# EAGLE board PicoBoard-GiantPanel-v12 (EAGLE 6.5.0), part 1 of 2
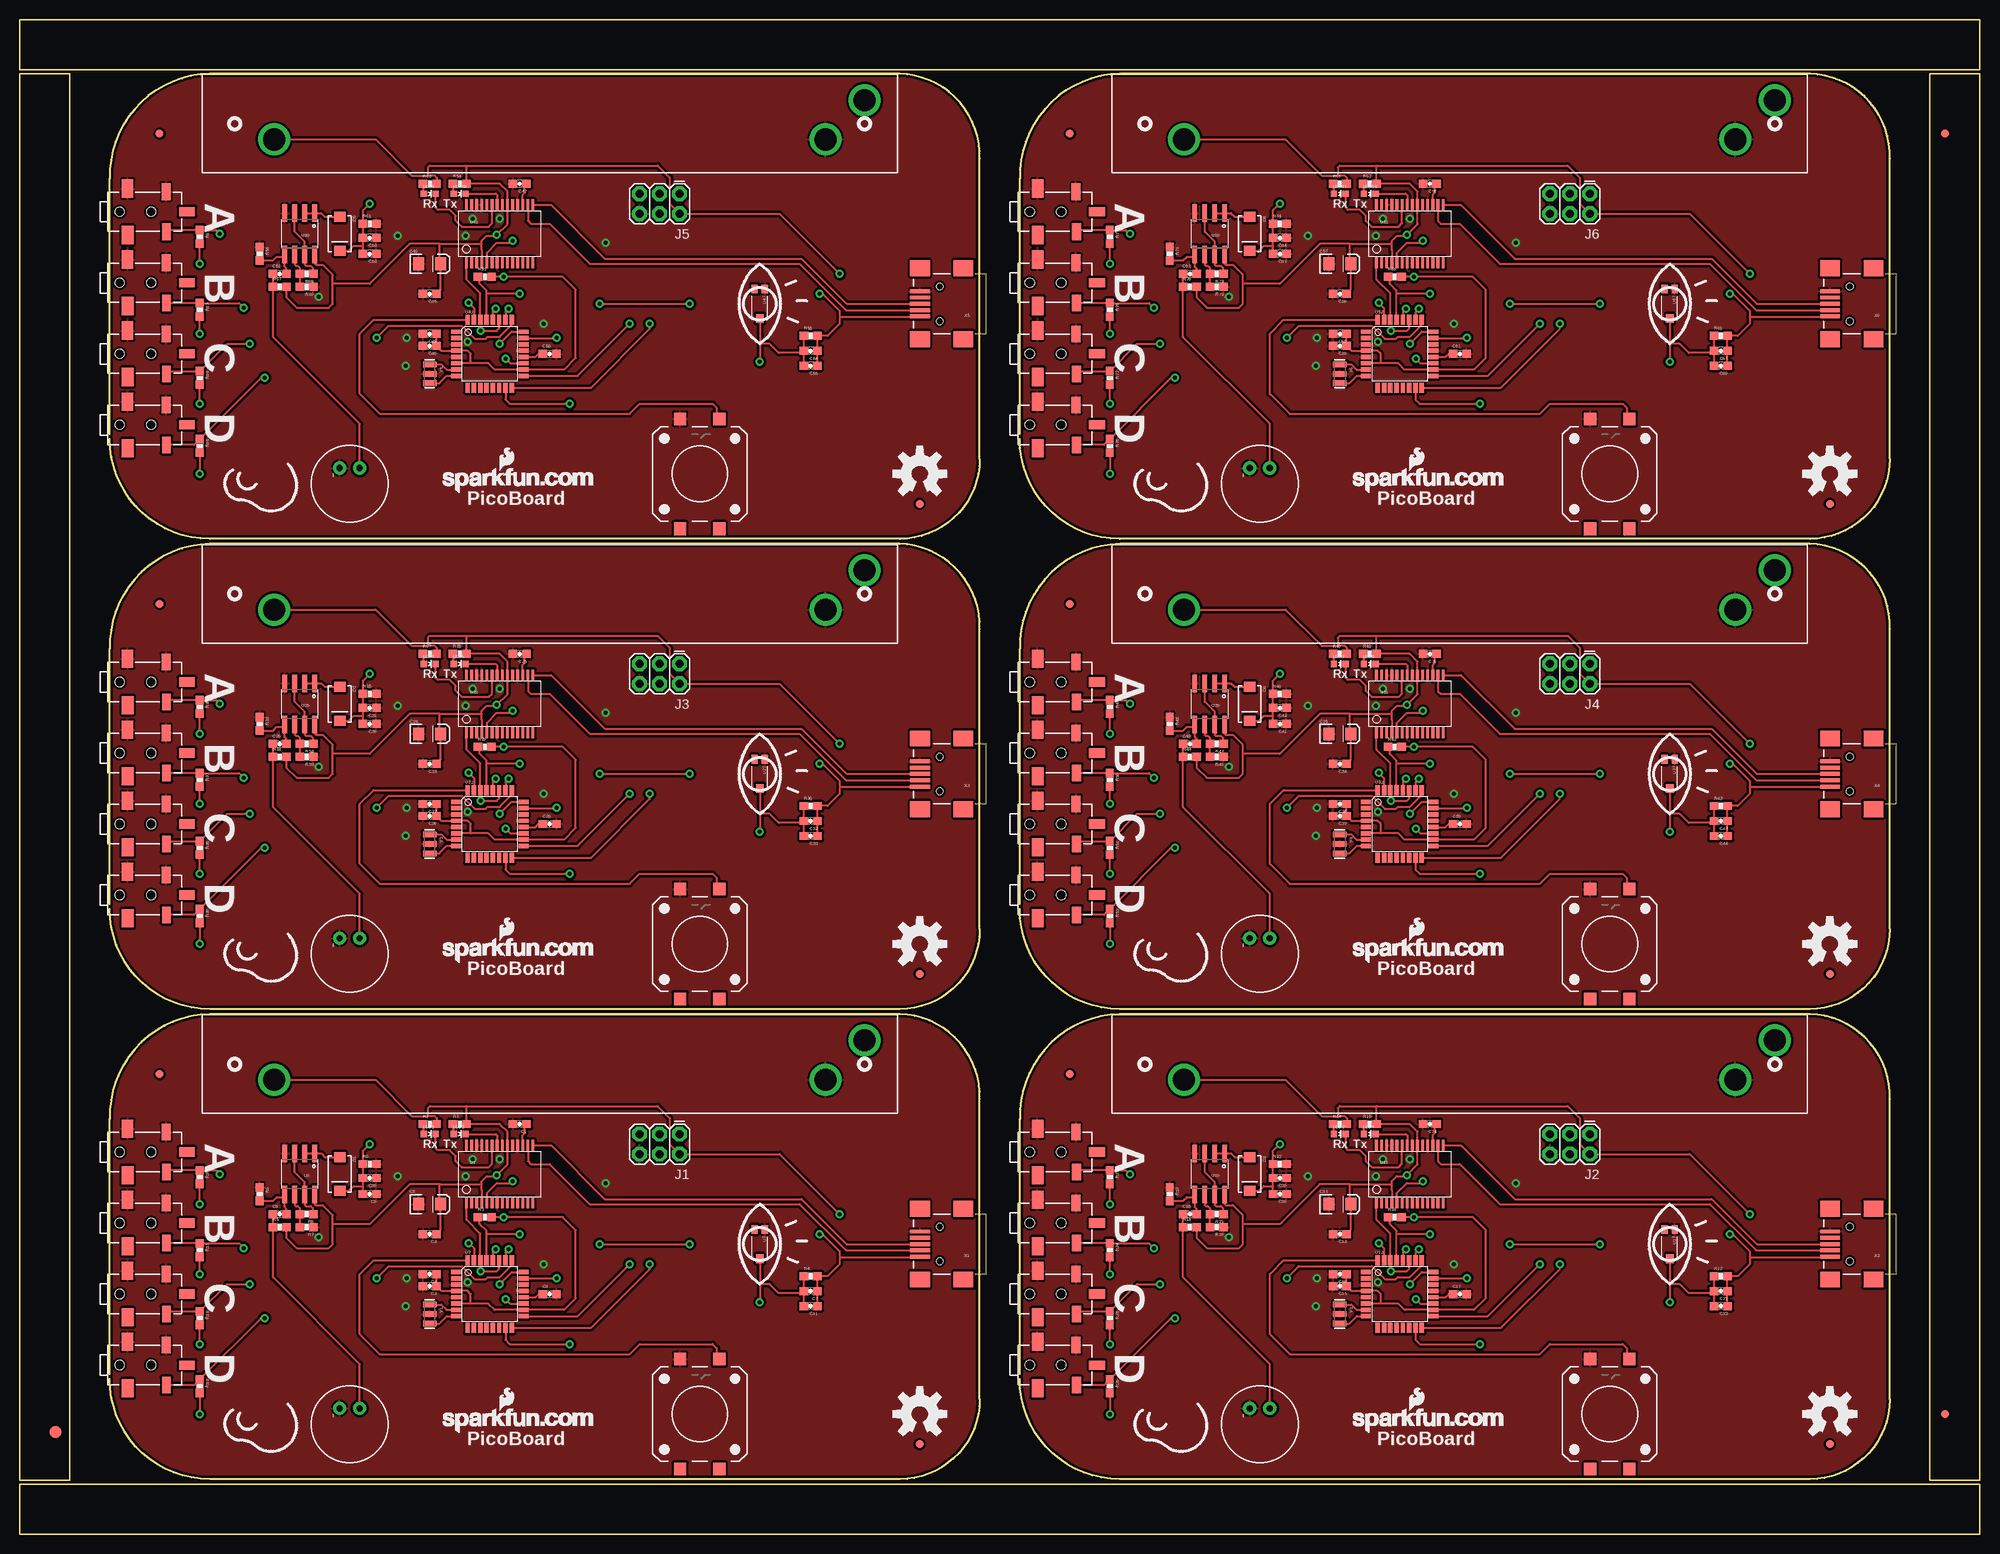
[diagram p0: board, top side]
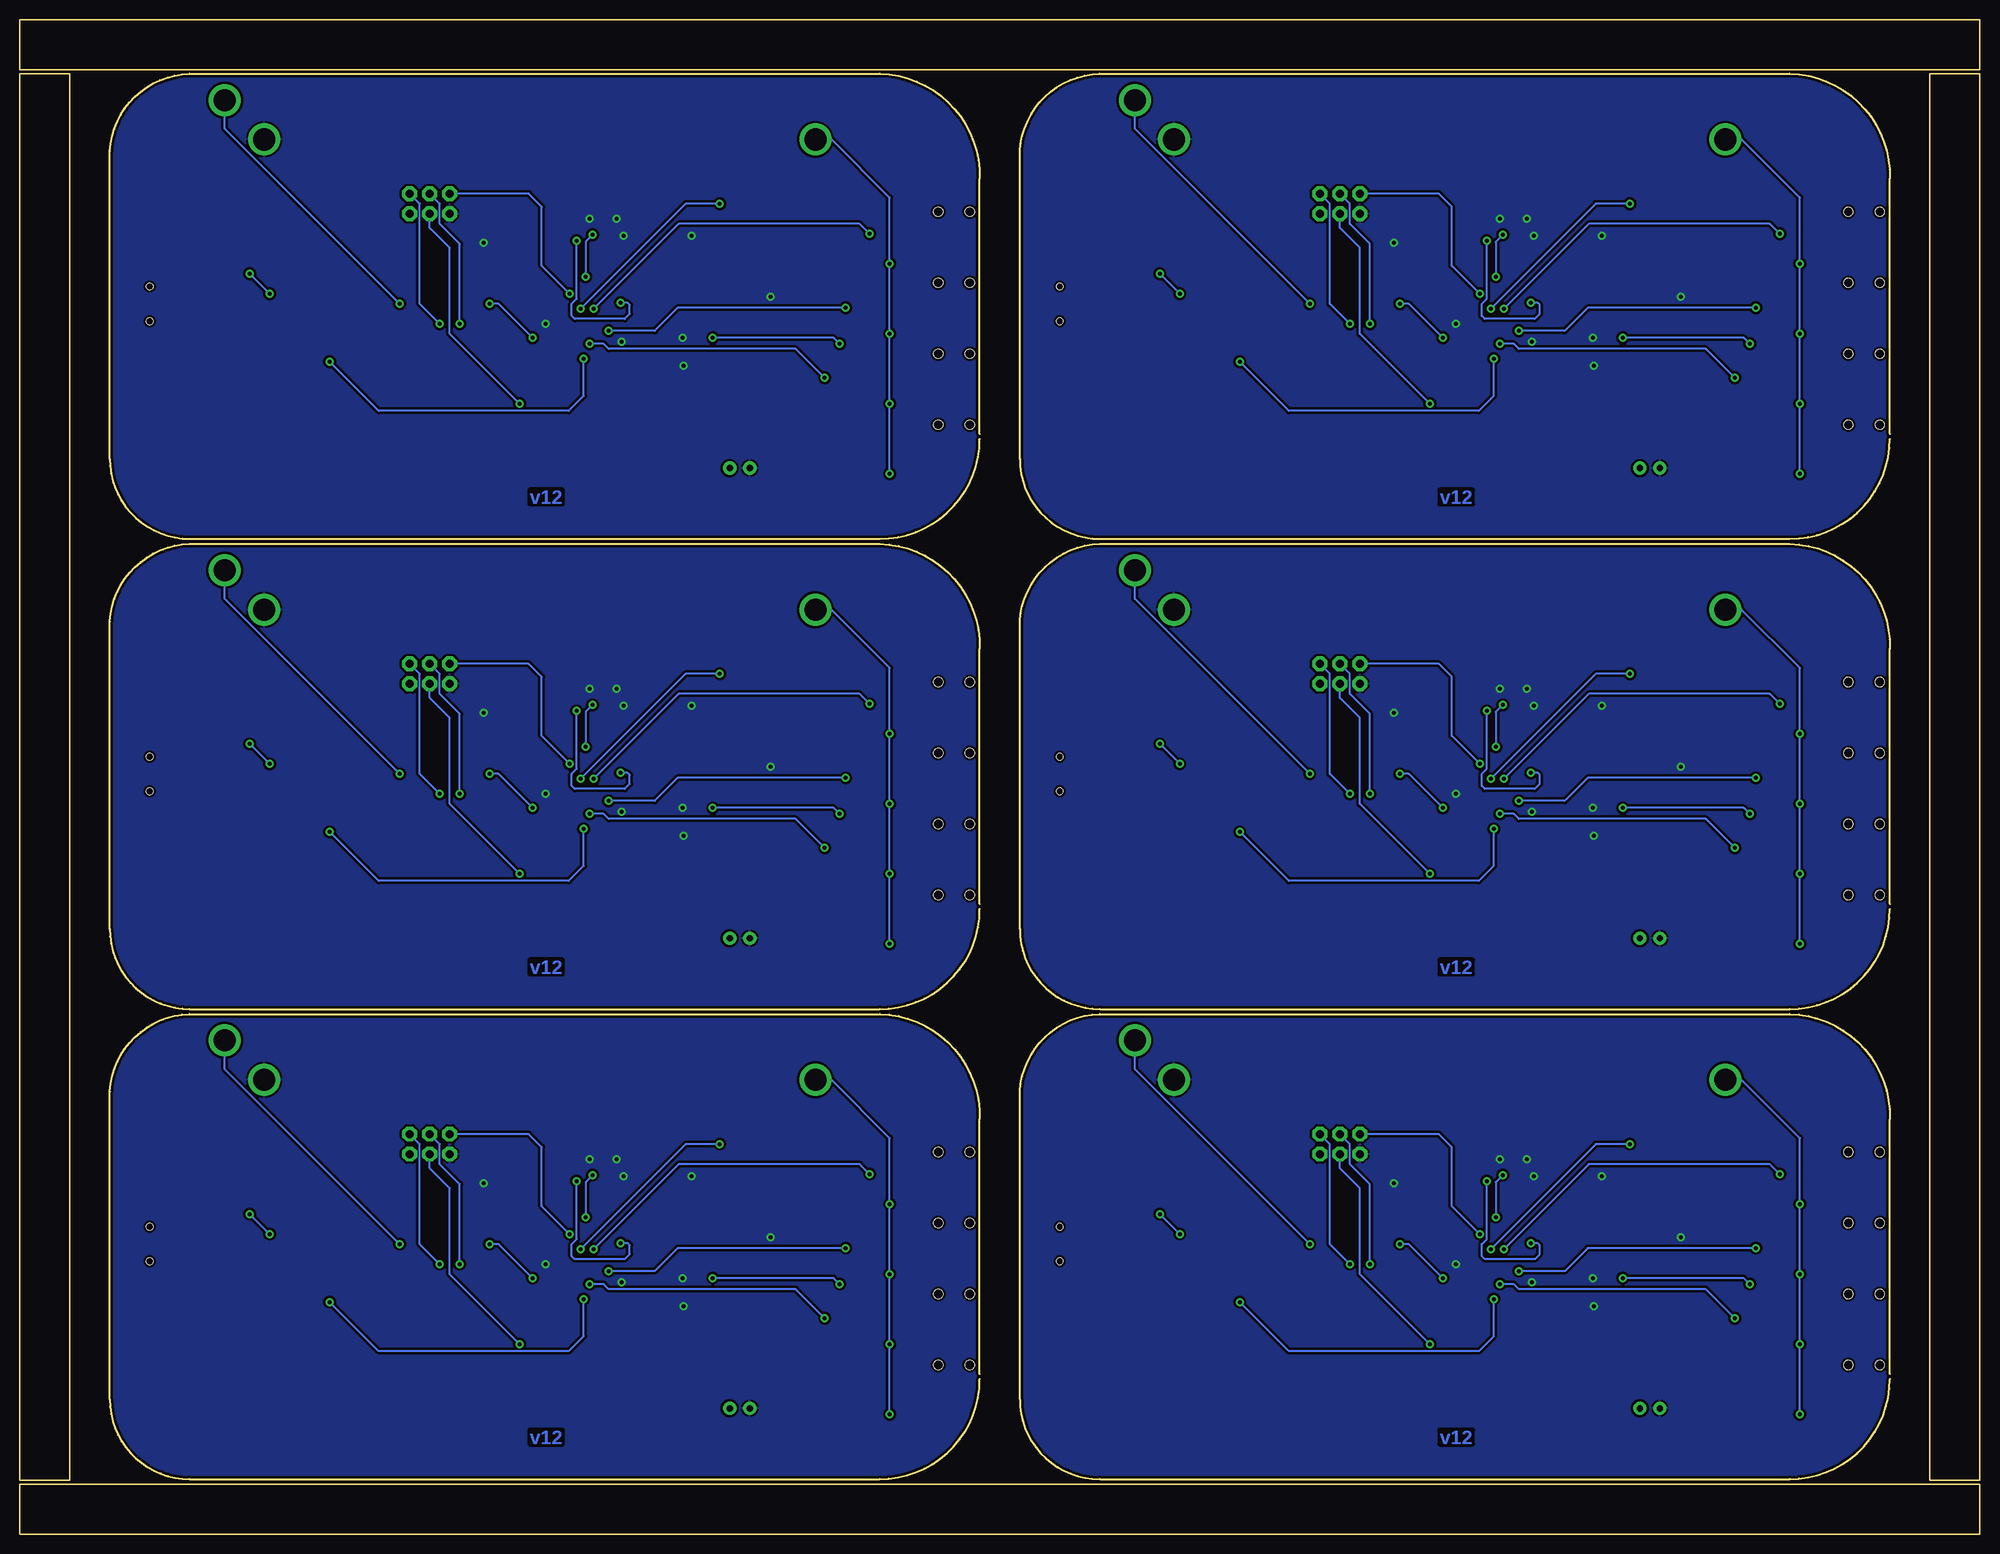
[diagram p1: board, bottom side, seen from below]

Size 248.92 x 192.28 mm. Coordinates in mm from the lower left corner, seen from the top.
Outline: 11.43,19.68 arc90 24.13,6.99 111.76,6.99 arc90 121.92,17.14 121.92,55.24 arc90 111.76,66.04 24.13,66.04 arc90 11.43,52.7 11.43,20.32
Outline: 127,19.68 arc90 139.7,6.99 227.33,6.99 arc90 237.49,17.14 237.49,55.24 arc90 227.33,66.04 139.7,66.04 arc90 127,52.7 127,20.32
Outline: 11.43,79.38 arc90 24.13,66.67 111.76,66.67 arc90 121.92,76.83 121.92,114.94 arc90 111.76,125.73 24.13,125.73 arc90 11.43,112.39 11.43,80.01
Outline: 127,79.38 arc90 139.7,66.67 227.33,66.67 arc90 237.49,76.83 237.49,114.94 arc90 227.33,125.73 139.7,125.73 arc90 127,112.39 127,80.01
Outline: 11.43,139.06 arc90 24.13,126.36 111.76,126.36 arc90 121.92,136.53 121.92,174.62 arc90 111.76,185.42 24.13,185.42 arc90 11.43,172.09 11.43,139.7
Outline: 127,139.06 arc90 139.7,126.36 227.33,126.36 arc90 237.49,136.53 237.49,174.62 arc90 227.33,185.42 139.7,185.42 arc90 127,172.09 127,139.7
Outline: 6.35,6.86 6.35,185.42 0,185.42 0,6.86 6.35,6.86
Outline: 248.92,6.86 248.92,185.42 242.57,185.42 242.57,6.86 248.92,6.86
Outline: 0,6.35 0,0 248.92,0 248.92,6.35 0,6.35
Outline: 0,192.28 0,185.93 248.92,185.93 248.92,192.28 0,192.28
Copper layers (1*16): Top 0.035mm / dielectric 1.5mm / Bottom 0.035mm
Design rules "SparkFun *": minimum track width 7mil, minimum drill 15mil, track to track 8mil, track to pad 8mil, pad to pad 8mil, via to via 8mil, smd to smd 8mil, copper to edge 8mil, drill to drill 8mil, minimum pad ring 12mil, minimum via ring 10mil, stop-mask expansion 4mil, vias tented up to drill 20mil, thermal gap 10mil
Net classes: 0 default: width 0.203 mm; 1 power: width 0.254 mm

## Footprints (pad centres in the part's own frame; a part is rotated, then mirrored left to right if it is on the bottom)
0603-CAP = smd 1.1 x 1: 1 -0.85,0; 2 0.85,0
EIA3216 = smd 1.4 x 1.6: A 1.4,0; C -1.4,0
SMA-DIODE = smd 1.27 x 1.47: A -2.15,0; C 2.15,0
FIDUCIAL-1.5X3 = smd 1.5 x 1.5: 1 0,0
FIDUCIAL-1X2 = smd 1 x 1: 1 0,0
2X3 = drill 1.016 pad 1.88 octagon: 1 0,0; 2 0,2.54; 3 2.54,0; 4 2.54,2.54; 5 5.08,0; 6 5.08,2.54
LED-0603 = smd 0.8 x 0.8: A 0,-0.75; C 0,0.75
0603-RES = smd 1.1 x 1: 1 -0.85,0; 2 0.85,0
TACTILE-SMD-12MM = smd 1.6 x 1.55: 1 6.975,-2.5; 2 -6.975,-2.5; 3 6.975,2.5; 4 -6.975,2.5
SSOP28DB = smd 0.348 x 1.397: 1 -4.225,-3.656; 2 -3.575,-3.656; 3 -2.925,-3.656; 4 -2.275,-3.656; 5 -1.625,-3.656; 6 -0.975,-3.656; 7 -0.325,-3.656; 8 0.325,-3.656; 9 0.975,-3.656; 10 1.625,-3.656; 11 2.275,-3.656; 12 2.925,-3.656; 13 3.575,-3.656; 14 4.225,-3.656; 15 4.225,3.656; 16 3.575,3.656; 17 2.925,3.656; 18 2.275,3.656; 19 1.625,3.656; 20 0.975,3.656; 21 0.325,3.656; 22 -0.325,3.656; 23 -0.975,3.656; 24 -1.625,3.656; 25 -2.275,3.656; 26 -2.925,3.656; 27 -3.575,3.656; 28 -4.225,3.656
TQFP32-08 = smd 1.27 x 0.559: 1 -4.293,2.8; 2 -4.293,2; 3 -4.293,1.2; 4 -4.293,0.4; 5 -4.293,-0.4; 6 -4.293,-1.2; 7 -4.293,-2; 8 -4.293,-2.8; 17 4.293,-2.8; 18 4.293,-2; 19 4.293,-1.2; 20 4.293,-0.4; 21 4.293,0.4; 22 4.293,1.2; 23 4.293,2; 24 4.293,2.8 | smd 0.559 x 1.27: 9 -2.8,-4.293; 10 -2,-4.293; 11 -1.2,-4.293; 12 -0.4,-4.293; 13 0.4,-4.293; 14 1.2,-4.293; 15 2,-4.293; 16 2.8,-4.293; 25 2.8,4.293; 26 2,4.293; 27 1.2,4.293; 28 0.4,4.293; 29 -0.4,4.293; 30 -1.2,4.293; 31 -2,4.293; 32 -2.8,4.293
STEREOJACK2.5MM = smd 1.144 x 2.1: 1 5.898,2.54 | smd 1.998 x 1.17: 3 8.55,0 | smd 1.119 x 2.1: 4 5.949,-2.54 | smd 1.467 x 2.3: 5 1,2.952; A 1.016,-2.952 | hole 1.2: 0,0; 4,0
TEMT6000-SEN = smd 1.1 x 0.8: BASE -1.87,-0.65; EMITTER -1.87,0.65 | smd 1.1 x 1: COLLECTOR 1.86,0.01
SO08 = smd 0.61 x 2.21: 1 -1.905,-2.616; 2 -0.635,-2.616; 3 0.635,-2.616; 4 1.905,-2.616; 5 1.905,2.616; 6 0.635,2.616; 7 -0.635,2.616; 8 -1.905,2.616
MIC-9.7MM = drill 0.8 pad 1.676: 1 -2,1.27; 2 -2,-1.27
SLIDER = drill 2.8 pad 4.064: 1 -35,2; 2A -40,-3; 3 35,2
USB-MINIB = smd 2.5 x 0.5: D+ 2.5,0; D- 2.5,0.8; GND 2.5,-1.6; ID 2.5,-0.8; VBUS 2.5,1.6 | smd 2.5 x 2: MTN1 -3,4.5; MTN2 2.5,4.5; MTN3 -3,-4.5; MTN4 2.5,-4.5 | hole 0.9: 0,2.2; 0,-2.2
RESONATOR-SMD = smd 0.7 x 1.7: 1 -1.2,0; 2 0,0; 3 1.2,0

## Placement (x,y rotation side)
C1  0.1uF  [0603-CAP]  63.5,52.07 180 top
C2  0.1uF  [0603-CAP]  52.07,38.1 180 top
C3  0.1uF  [0603-CAP]  52.07,31.5 180 top
C4  0.1uF  [0603-CAP]  52.07,33.02 180 top
C5  10uF  [EIA3216]  52.07,41.91 0 top
C6  0.1uF  [0603-CAP]  67.31,30.48 0 top
C7  0.22uF  [0603-CAP]  100.46,30.86 180 top
C8  0.1uF  [0603-CAP]  33.02,40.64 0 top
C9  0.1uF  [0603-CAP]  44.45,43.18 180 top
C10  0.1uF  [0603-CAP]  44.45,45.21 180 top
C11  0.1uF  [0603-CAP]  100.46,28.96 180 top
C12  0.1uF  [0603-CAP]  167.64,38.1 180 top
C13  10uF  [EIA3216]  167.64,41.91 0 top
C14  0.1uF  [0603-CAP]  179.07,52.07 180 top
C15  0.1uF  [0603-CAP]  167.64,31.5 180 top
C16  0.1uF  [0603-CAP]  167.64,33.02 180 top
C17  0.1uF  [0603-CAP]  182.88,30.48 0 top
C18  0.1uF  [0603-CAP]  148.59,40.64 0 top
C19  0.1uF  [0603-CAP]  160.02,43.18 180 top
C20  0.1uF  [0603-CAP]  160.02,45.21 180 top
C21  0.22uF  [0603-CAP]  216.03,30.86 180 top
C22  0.1uF  [0603-CAP]  216.03,28.96 180 top
C23  0.1uF  [0603-CAP]  52.07,97.79 180 top
C24  10uF  [EIA3216]  52.07,101.6 0 top
C25  0.1uF  [0603-CAP]  63.5,111.76 180 top
C26  0.1uF  [0603-CAP]  52.07,91.19 180 top
C27  0.1uF  [0603-CAP]  52.07,92.71 180 top
C28  0.1uF  [0603-CAP]  67.31,90.17 0 top
C29  0.1uF  [0603-CAP]  33.02,100.33 0 top
C30  0.1uF  [0603-CAP]  44.45,102.87 180 top
C31  0.1uF  [0603-CAP]  44.45,104.9 180 top
C32  0.22uF  [0603-CAP]  100.46,90.55 180 top
C33  0.1uF  [0603-CAP]  100.46,88.65 180 top
C34  0.1uF  [0603-CAP]  167.64,97.79 180 top
C35  10uF  [EIA3216]  167.64,101.6 0 top
C36  0.1uF  [0603-CAP]  179.07,111.76 180 top
C37  0.1uF  [0603-CAP]  167.64,91.19 180 top
C38  0.1uF  [0603-CAP]  167.64,92.71 180 top
C39  0.1uF  [0603-CAP]  182.88,90.17 0 top
C40  0.1uF  [0603-CAP]  148.59,100.33 0 top
C41  0.1uF  [0603-CAP]  160.02,102.87 180 top
C42  0.1uF  [0603-CAP]  160.02,104.9 180 top
C43  0.22uF  [0603-CAP]  216.03,90.55 180 top
C44  0.1uF  [0603-CAP]  216.03,88.65 180 top
C45  0.1uF  [0603-CAP]  52.07,157.48 180 top
C46  10uF  [EIA3216]  52.07,161.29 0 top
C47  0.1uF  [0603-CAP]  63.5,171.45 180 top
C48  0.1uF  [0603-CAP]  52.07,150.88 180 top
C49  0.1uF  [0603-CAP]  52.07,152.4 180 top
C50  0.1uF  [0603-CAP]  67.31,149.86 0 top
C51  0.1uF  [0603-CAP]  33.02,160.02 0 top
C52  0.1uF  [0603-CAP]  44.45,162.56 180 top
C53  0.1uF  [0603-CAP]  44.45,164.59 180 top
C54  0.22uF  [0603-CAP]  100.46,150.24 180 top
C55  0.1uF  [0603-CAP]  100.46,148.34 180 top
C56  0.1uF  [0603-CAP]  167.64,157.48 180 top
C57  10uF  [EIA3216]  167.64,161.29 0 top
C58  0.1uF  [0603-CAP]  179.07,171.45 180 top
C59  0.1uF  [0603-CAP]  167.64,150.88 180 top
C60  0.1uF  [0603-CAP]  167.64,152.4 180 top
C61  0.1uF  [0603-CAP]  182.88,149.86 0 top
C62  0.1uF  [0603-CAP]  148.59,160.02 0 top
C63  0.1uF  [0603-CAP]  160.02,162.56 180 top
C64  0.1uF  [0603-CAP]  160.02,164.59 180 top
C65  0.22uF  [0603-CAP]  216.03,150.24 180 top
C66  0.1uF  [0603-CAP]  216.03,148.34 180 top
D1  MBRA140  [SMA-DIODE]  40.64,45.72 270 top
D2  MBRA140  [SMA-DIODE]  156.21,45.72 270 top
D3  MBRA140  [SMA-DIODE]  40.64,105.41 270 top
D4  MBRA140  [SMA-DIODE]  156.21,105.41 270 top
D5  MBRA140  [SMA-DIODE]  40.64,165.1 270 top
D6  MBRA140  [SMA-DIODE]  156.21,165.1 270 top
E$1  [FIDUCIAL-1.5X3]  4.57,12.95 0 top
E$2  [FIDUCIAL-1X2]  244.47,15.24 0 top
E$4  [FIDUCIAL-1X2]  244.47,177.8 180 top
FID1  FIDUCIAL1X2  [FIDUCIAL-1X2]  17.78,58.42 0 top
FID2  FIDUCIAL1X2  [FIDUCIAL-1X2]  114.3,11.43 0 top
FID3  FIDUCIAL1X2  [FIDUCIAL-1X2]  133.35,58.42 0 top
FID4  FIDUCIAL1X2  [FIDUCIAL-1X2]  229.87,11.43 0 top
FID5  FIDUCIAL1X2  [FIDUCIAL-1X2]  17.78,118.11 0 top
FID6  FIDUCIAL1X2  [FIDUCIAL-1X2]  114.3,71.12 0 top
FID7  FIDUCIAL1X2  [FIDUCIAL-1X2]  133.35,118.11 0 top
FID8  FIDUCIAL1X2  [FIDUCIAL-1X2]  229.87,71.12 0 top
FID9  FIDUCIAL1X2  [FIDUCIAL-1X2]  17.78,177.8 0 top
FID10  FIDUCIAL1X2  [FIDUCIAL-1X2]  114.3,130.81 0 top
FID11  FIDUCIAL1X2  [FIDUCIAL-1X2]  133.35,177.8 0 top
FID12  FIDUCIAL1X2  [FIDUCIAL-1X2]  229.87,130.81 0 top
J1  AVR Prog.  [2X3]  83.82,50.8 180 top
J2  AVR Prog.  [2X3]  199.39,50.8 180 top
J3  AVR Prog.  [2X3]  83.82,110.49 180 top
J4  AVR Prog.  [2X3]  199.39,110.49 180 top
J5  AVR Prog.  [2X3]  83.82,170.18 180 top
J6  AVR Prog.  [2X3]  199.39,170.18 180 top
JP1  LOGO-SFENEW  [SFE-NEW-WEBLOGO]  53.72,12.83 0 top
JP2  LOGO-SFENEW  [SFE-NEW-WEBLOGO]  169.29,12.83 0 top
JP3  LOGO-SFENEW  [SFE-NEW-WEBLOGO]  53.72,72.52 0 top
JP4  LOGO-SFENEW  [SFE-NEW-WEBLOGO]  169.29,72.52 0 top
JP5  LOGO-SFENEW  [SFE-NEW-WEBLOGO]  53.72,132.21 0 top
JP6  LOGO-SFENEW  [SFE-NEW-WEBLOGO]  169.29,132.21 0 top
LED1  Red  [LED-0603]  52.07,50.8 270 top
LED2  Green  [LED-0603]  55.88,50.8 270 top
LED3  Red  [LED-0603]  167.64,50.8 270 top
LED4  Green  [LED-0603]  171.45,50.8 270 top
LED5  Red  [LED-0603]  52.07,110.49 270 top
LED6  Green  [LED-0603]  55.88,110.49 270 top
LED7  Red  [LED-0603]  167.64,110.49 270 top
LED8  Green  [LED-0603]  171.45,110.49 270 top
LED9  Red  [LED-0603]  52.07,170.18 270 top
LED10  Green  [LED-0603]  55.88,170.18 270 top
LED11  Red  [LED-0603]  167.64,170.18 270 top
LED12  Green  [LED-0603]  171.45,170.18 270 top
LOGO1  OSHW-LOGOL  [OSHW-LOGO-L]  114.3,15.24 0 top
LOGO2  OSHW-LOGOL  [OSHW-LOGO-L]  229.87,15.24 0 top
LOGO3  OSHW-LOGOL  [OSHW-LOGO-L]  114.3,74.93 0 top
LOGO4  OSHW-LOGOL  [OSHW-LOGO-L]  229.87,74.93 0 top
LOGO5  OSHW-LOGOL  [OSHW-LOGO-L]  114.3,134.62 0 top
LOGO6  OSHW-LOGOL  [OSHW-LOGO-L]  229.87,134.62 0 top
R1  1K  [0603-RES]  52.07,52.07 0 top
R2  1K  [0603-RES]  55.88,52.07 0 top
R3  10k  [0603-RES]  59.05,40.26 0 top
R4  100k  [0603-RES]  100.46,32.77 0 top
R5  10k  [0603-RES]  33.02,38.99 0 top
R6  10k  [0603-RES]  30.48,43.18 270 top
R7  2.2k  [0603-RES]  36.45,38.99 180 top
R8  100k  [0603-RES]  36.45,40.64 180 top
R9  100k  [0603-RES]  44.45,46.99 0 top
R10  10k  [0603-RES]  22.86,45.34 270 top
R11  10k  [0603-RES]  22.86,36.07 270 top
R12  10k  [0603-RES]  22.86,27.43 270 top
R13  10k  [0603-RES]  22.86,18.8 270 top
R14  1K  [0603-RES]  167.64,52.07 0 top
R15  1K  [0603-RES]  171.45,52.07 0 top
R16  10k  [0603-RES]  174.62,40.26 0 top
R17  100k  [0603-RES]  216.03,32.77 0 top
R18  10k  [0603-RES]  148.59,38.99 0 top
R19  10k  [0603-RES]  146.05,43.18 270 top
R20  2.2k  [0603-RES]  152.02,38.99 180 top
R21  100k  [0603-RES]  152.02,40.64 180 top
R22  100k  [0603-RES]  160.02,46.99 0 top
R23  10k  [0603-RES]  138.43,45.34 270 top
R24  10k  [0603-RES]  138.43,36.07 270 top
R25  10k  [0603-RES]  138.43,27.43 270 top
R26  10k  [0603-RES]  138.43,18.8 270 top
R27  1K  [0603-RES]  52.07,111.76 0 top
R28  1K  [0603-RES]  55.88,111.76 0 top
R29  10k  [0603-RES]  59.05,99.95 0 top
R30  100k  [0603-RES]  100.46,92.46 0 top
R31  10k  [0603-RES]  33.02,98.68 0 top
R32  10k  [0603-RES]  30.48,102.87 270 top
R33  2.2k  [0603-RES]  36.45,98.68 180 top
R34  100k  [0603-RES]  36.45,100.33 180 top
R35  100k  [0603-RES]  44.45,106.68 0 top
R36  10k  [0603-RES]  22.86,105.03 270 top
R37  10k  [0603-RES]  22.86,95.76 270 top
R38  10k  [0603-RES]  22.86,87.12 270 top
R39  10k  [0603-RES]  22.86,78.49 270 top
R40  1K  [0603-RES]  167.64,111.76 0 top
R41  1K  [0603-RES]  171.45,111.76 0 top
R42  10k  [0603-RES]  174.62,99.95 0 top
R43  100k  [0603-RES]  216.03,92.46 0 top
R44  10k  [0603-RES]  148.59,98.68 0 top
R45  10k  [0603-RES]  146.05,102.87 270 top
R46  2.2k  [0603-RES]  152.02,98.68 180 top
R47  100k  [0603-RES]  152.02,100.33 180 top
R48  100k  [0603-RES]  160.02,106.68 0 top
R49  10k  [0603-RES]  138.43,105.03 270 top
R50  10k  [0603-RES]  138.43,95.76 270 top
R51  10k  [0603-RES]  138.43,87.12 270 top
R52  10k  [0603-RES]  138.43,78.49 270 top
R53  1K  [0603-RES]  52.07,171.45 0 top
R54  1K  [0603-RES]  55.88,171.45 0 top
R55  10k  [0603-RES]  59.05,159.64 0 top
R56  100k  [0603-RES]  100.46,152.15 0 top
R57  10k  [0603-RES]  33.02,158.37 0 top
R58  10k  [0603-RES]  30.48,162.56 270 top
R59  2.2k  [0603-RES]  36.45,158.37 180 top
R60  100k  [0603-RES]  36.45,160.02 180 top
R61  100k  [0603-RES]  44.45,166.37 0 top
R62  10k  [0603-RES]  22.86,164.72 270 top
R63  10k  [0603-RES]  22.86,155.45 270 top
R64  10k  [0603-RES]  22.86,146.81 270 top
R65  10k  [0603-RES]  22.86,138.18 270 top
R66  1K  [0603-RES]  167.64,171.45 0 top
R67  1K  [0603-RES]  171.45,171.45 0 top
R68  10k  [0603-RES]  174.62,159.64 0 top
R69  100k  [0603-RES]  216.03,152.15 0 top
R70  10k  [0603-RES]  148.59,158.37 0 top
R71  10k  [0603-RES]  146.05,162.56 270 top
R72  2.2k  [0603-RES]  152.02,158.37 180 top
R73  100k  [0603-RES]  152.02,160.02 180 top
R74  100k  [0603-RES]  160.02,166.37 0 top
R75  10k  [0603-RES]  138.43,164.72 270 top
R76  10k  [0603-RES]  138.43,155.45 270 top
R77  10k  [0603-RES]  138.43,146.81 270 top
R78  10k  [0603-RES]  138.43,138.18 270 top
S1  12mm Button  [TACTILE-SMD-12MM]  201.93,15.24 90 top
S2  12mm Button  [TACTILE-SMD-12MM]  86.36,15.24 90 top
S3  12mm Button  [TACTILE-SMD-12MM]  86.36,74.93 90 top
S4  12mm Button  [TACTILE-SMD-12MM]  201.93,74.93 90 top
S5  12mm Button  [TACTILE-SMD-12MM]  86.36,134.62 90 top
S6  12mm Button  [TACTILE-SMD-12MM]  201.93,134.62 90 top
U1  FT232RLSSOP  [SSOP28DB]  60.96,45.72 0 top
U2  ATMEGA328  [TQFP32-08]  59.69,30.48 0 top
U3  2.5mm  [STEREOJACK2.5MM]  12.7,48.51 0 top
U4  2.5mm  [STEREOJACK2.5MM]  12.7,39.5 0 top
U5  2.5mm  [STEREOJACK2.5MM]  12.7,30.48 0 top
U6  2.5mm  [STEREOJACK2.5MM]  12.7,21.46 0 top
U7  TEMT6000  [TEMT6000-SEN]  93.98,36.83 270 top
U8  LMV358  [SO08]  35.56,45.72 180 top
U9  MIC9.7MM  [MIC-9.7MM]  41.91,13.97 270 top
U10  [SLIDER]  67.31,59.69 180 top
U11  FT232RLSSOP  [SSOP28DB]  176.53,45.72 0 top
U12  ATMEGA328  [TQFP32-08]  175.26,30.48 0 top
U13  2.5mm  [STEREOJACK2.5MM]  128.27,48.51 0 top
U14  2.5mm  [STEREOJACK2.5MM]  128.27,39.5 0 top
U15  2.5mm  [STEREOJACK2.5MM]  128.27,30.48 0 top
U16  2.5mm  [STEREOJACK2.5MM]  128.27,21.46 0 top
U17  TEMT6000  [TEMT6000-SEN]  209.55,36.83 270 top
U18  MIC9.7MM  [MIC-9.7MM]  157.48,13.97 270 top
U19  LMV358  [SO08]  151.13,45.72 180 top
U20  [SLIDER]  182.88,59.69 180 top
U21  FT232RLSSOP  [SSOP28DB]  60.96,105.41 0 top
U22  ATMEGA328  [TQFP32-08]  59.69,90.17 0 top
U23  2.5mm  [STEREOJACK2.5MM]  12.7,108.2 0 top
U24  2.5mm  [STEREOJACK2.5MM]  12.7,99.19 0 top
U25  2.5mm  [STEREOJACK2.5MM]  12.7,90.17 0 top
U26  2.5mm  [STEREOJACK2.5MM]  12.7,81.15 0 top
U27  TEMT6000  [TEMT6000-SEN]  93.98,96.52 270 top
U28  MIC9.7MM  [MIC-9.7MM]  41.91,73.66 270 top
U29  LMV358  [SO08]  35.56,105.41 180 top
U30  [SLIDER]  67.31,119.38 180 top
U31  FT232RLSSOP  [SSOP28DB]  176.53,105.41 0 top
U32  ATMEGA328  [TQFP32-08]  175.26,90.17 0 top
U33  2.5mm  [STEREOJACK2.5MM]  128.27,108.2 0 top
U34  2.5mm  [STEREOJACK2.5MM]  128.27,99.19 0 top
U35  2.5mm  [STEREOJACK2.5MM]  128.27,90.17 0 top
U36  2.5mm  [STEREOJACK2.5MM]  128.27,81.15 0 top
U37  TEMT6000  [TEMT6000-SEN]  209.55,96.52 270 top
U38  MIC9.7MM  [MIC-9.7MM]  157.48,73.66 270 top
U39  LMV358  [SO08]  151.13,105.41 180 top
U40  [SLIDER]  182.88,119.38 180 top
U41  FT232RLSSOP  [SSOP28DB]  60.96,165.1 0 top
U42  ATMEGA328  [TQFP32-08]  59.69,149.86 0 top
U43  2.5mm  [STEREOJACK2.5MM]  12.7,167.89 0 top
U44  2.5mm  [STEREOJACK2.5MM]  12.7,158.88 0 top
U45  2.5mm  [STEREOJACK2.5MM]  12.7,149.86 0 top
U46  2.5mm  [STEREOJACK2.5MM]  12.7,140.84 0 top
U47  TEMT6000  [TEMT6000-SEN]  93.98,156.21 270 top
U48  MIC9.7MM  [MIC-9.7MM]  41.91,133.35 270 top
U49  LMV358  [SO08]  35.56,165.1 180 top
U50  [SLIDER]  67.31,179.07 180 top
U51  FT232RLSSOP  [SSOP28DB]  176.53,165.1 0 top
U52  ATMEGA328  [TQFP32-08]  175.26,149.86 0 top
U53  2.5mm  [STEREOJACK2.5MM]  128.27,167.89 0 top
U54  2.5mm  [STEREOJACK2.5MM]  128.27,158.88 0 top
U55  2.5mm  [STEREOJACK2.5MM]  128.27,149.86 0 top
U56  2.5mm  [STEREOJACK2.5MM]  128.27,140.84 0 top
U57  TEMT6000  [TEMT6000-SEN]  209.55,156.21 270 top
U58  MIC9.7MM  [MIC-9.7MM]  157.48,133.35 270 top
U59  LMV358  [SO08]  151.13,165.1 180 top
U60  [SLIDER]  182.88,179.07 180 top
X1  USBSMD  [USB-MINIB]  116.84,36.83 180 top
X2  USBSMD  [USB-MINIB]  232.41,36.83 180 top
X3  USBSMD  [USB-MINIB]  116.84,96.52 180 top
X4  USBSMD  [USB-MINIB]  232.41,96.52 180 top
X5  USBSMD  [USB-MINIB]  116.84,156.21 180 top
X6  USBSMD  [USB-MINIB]  232.41,156.21 180 top
Y1  16MHz  [RESONATOR-SMD]  52.07,27.94 270 top
Y2  16MHz  [RESONATOR-SMD]  167.64,27.94 270 top
Y3  16MHz  [RESONATOR-SMD]  52.07,87.63 270 top
Y4  16MHz  [RESONATOR-SMD]  167.64,87.63 270 top
Y5  16MHz  [RESONATOR-SMD]  52.07,147.32 270 top
Y6  16MHz  [RESONATOR-SMD]  167.64,147.32 270 top

## Library data of the parts
C1-C66 D1-D6 J1-J6 JP1-JP6 LED1-LED12 R1-R78 U1 U2 U7-U9 U11 U12 U17-U19 U21 U22 U27-U29 U31 U32 U37-U39 U41 U42 U47-U49 U51 U52 U57-U59 X1-X6 Y1-Y6 = SparkFun
E$1 E$2 E$4 FID1-FID12 LOGO1-LOGO6 = SparkFun-Aesthetics
S1-S6 = SparkFun-Electromechanical
U3-U6 U13-U16 U23-U26 U33-U36 U43-U46 U53-U56 = SparkFun-Connectors
U10 U20 U30 U40 U50 U60 = SparkFun-Electromechanical; PROD_ID: RES-09484

## Nets
3.3V [power]: C1.1 U1.17
3.3V1 [power]: C14.1 U11.17
3.3V2 [power]: C25.1 U21.17
3.3V3 [power]: C36.1 U31.17
3.3V4 [power]: C47.1 U41.17
3.3V5 [power]: C58.1 U51.17
5V: C2.1 C3.1 C4.1 C5.A C7.1 C11.1 J1.2 R1.2 R2.2 R3.2 R4.2 R5.2 R10.2 R11.2 R12.2 R13.2 U1.4 U1.20 U2.4 U2.6 U2.18 U8.8 U10.3 X1.VBUS
5V1: C12.1 C13.A C15.1 C16.1 C21.1 C22.1 J2.2 R14.2 R15.2 R16.2 R17.2 R18.2 R23.2 R24.2 R25.2 R26.2 U11.4 U11.20 U12.4 U12.6 U12.18 U19.8 U20.3 X2.VBUS
5V2: C23.1 C24.A C26.1 C27.1 C32.1 C33.1 J3.2 R27.2 R28.2 R29.2 R30.2 R31.2 R36.2 R37.2 R38.2 R39.2 U21.4 U21.20 U22.4 U22.6 U22.18 U29.8 U30.3 X3.VBUS
5V3: C34.1 C35.A C37.1 C38.1 C43.1 C44.1 J4.2 R40.2 R41.2 R42.2 R43.2 R44.2 R49.2 R50.2 R51.2 R52.2 U31.4 U31.20 U32.4 U32.6 U32.18 U39.8 U40.3 X4.VBUS
5V4: C45.1 C46.A C48.1 C49.1 C54.1 C55.1 J5.2 R53.2 R54.2 R55.2 R56.2 R57.2 R62.2 R63.2 R64.2 R65.2 U41.4 U41.20 U42.4 U42.6 U42.18 U49.8 U50.3 X5.VBUS
5V5: C56.1 C57.A C59.1 C60.1 C65.1 C66.1 J6.2 R66.2 R67.2 R68.2 R69.2 R70.2 R75.2 R76.2 R77.2 R78.2 U51.4 U51.20 U52.4 U52.6 U52.18 U59.8 U60.3 X6.VBUS
GND [power]: C1.2 C2.2 C3.2 C4.2 C5.C C6.2 C9.1 C10.1 J1.6 R6.1 R7.1 R9.2 S2.3 U1.7 U1.18 U1.21 U1.25 U1.26 U2.3 U2.5 U2.21 U3.1 U3.5 U4.1 U4.5 U5.1 U5.5 U6.1 U6.5 U7.EMITTER U8.4 U9.2 U10.1 X1.GND Y1.2
GND1 [power]: C12.2 C13.C C14.2 C15.2 C16.2 C17.2 C19.1 C20.1 J2.6 R19.1 R20.1 R22.2 S1.3 U11.7 U11.18 U11.21 U11.25 U11.26 U12.3 U12.5 U12.21 U13.1 U13.5 U14.1 U14.5 U15.1 U15.5 U16.1 U16.5 U17.EMITTER U18.2 U19.4 U20.1 X2.GND Y2.2
GND2 [power]: C23.2 C24.C C25.2 C26.2 C27.2 C28.2 C30.1 C31.1 J3.6 R32.1 R33.1 R35.2 S3.3 U21.7 U21.18 U21.21 U21.25 U21.26 U22.3 U22.5 U22.21 U23.1 U23.5 U24.1 U24.5 U25.1 U25.5 U26.1 U26.5 U27.EMITTER U28.2 U29.4 U30.1 X3.GND Y3.2
GND3 [power]: C34.2 C35.C C36.2 C37.2 C38.2 C39.2 C41.1 C42.1 J4.6 R45.1 R46.1 R48.2 S4.3 U31.7 U31.18 U31.21 U31.25 U31.26 U32.3 U32.5 U32.21 U33.1 U33.5 U34.1 U34.5 U35.1 U35.5 U36.1 U36.5 U37.EMITTER U38.2 U39.4 U40.1 X4.GND Y4.2
GND4 [power]: C45.2 C46.C C47.2 C48.2 C49.2 C50.2 C52.1 C53.1 J5.6 R58.1 R59.1 R61.2 S5.3 U41.7 U41.18 U41.21 U41.25 U41.26 U42.3 U42.5 U42.21 U43.1 U43.5 U44.1 U44.5 U45.1 U45.5 U46.1 U46.5 U47.EMITTER U48.2 U49.4 U50.1 X5.GND Y5.2
GND5 [power]: C56.2 C57.C C58.2 C59.2 C60.2 C61.2 C63.1 C64.1 J6.6 R71.1 R72.1 R74.2 S6.3 U51.7 U51.18 U51.21 U51.25 U51.26 U52.3 U52.5 U52.21 U53.1 U53.5 U54.1 U54.5 U55.1 U55.5 U56.1 U56.5 U57.EMITTER U58.2 U59.4 U60.1 X6.GND Y6.2
LIGHT: C7.2 C11.2 R4.1 U2.19 U7.COLLECTOR
LIGHT1: C21.2 C22.2 R17.1 U12.19 U17.COLLECTOR
LIGHT2: C32.2 C33.2 R30.1 U22.19 U27.COLLECTOR
LIGHT3: C43.2 C44.2 R43.1 U32.19 U37.COLLECTOR
LIGHT4: C54.2 C55.2 R56.1 U42.19 U47.COLLECTOR
LIGHT5: C65.2 C66.2 R69.1 U52.19 U57.COLLECTOR
MISO: J1.1 U2.16
MISO1: J2.1 U12.16
MISO2: J3.1 U22.16
MISO3: J4.1 U32.16
MISO4: J5.1 U42.16
MISO5: J6.1 U52.16
MOSI: J1.4 U2.15
MOSI1: J2.4 U12.15
MOSI2: J3.4 U22.15
MOSI3: J4.4 U32.15
MOSI4: J5.4 U42.15
MOSI5: J6.4 U52.15
N$1: LED1.A R1.1
N$2: LED2.A R2.1
N$3: R7.2 R8.2 U8.6
N$4: LED3.A R14.1
N$5: U2.7 Y1.1
N$6: U2.8 Y1.3
N$7: C6.1 U2.20
N$8: S2.1 U2.32
N$9: C8.1 R5.1 U9.1
N$10: U2.23 U10.2A
N$11: C8.2 R6.2 U8.5
N$12: LED4.A R15.1
N$13: D1.A U8.1 U8.2
N$14: U12.7 Y2.1
N$15: U12.8 Y2.3
N$16: R8.1 U8.3 U8.7
N$17: C17.1 U12.20
N$18: S1.1 U12.32
N$19: C18.1 R18.1 U18.1
N$20: C18.2 R19.2 U19.5
N$21: R20.2 R21.2 U19.6
N$22: D2.A U19.1 U19.2
N$23: R21.1 U19.3 U19.7
N$24: U12.23 U20.2A
N$25: LED5.A R27.1
N$26: LED6.A R28.1
N$27: U22.7 Y3.1
N$28: U22.8 Y3.3
N$29: C28.1 U22.20
N$30: S3.1 U22.32
N$31: C29.1 R31.1 U28.1
N$32: C29.2 R32.2 U29.5
N$33: R33.2 R34.2 U29.6
N$34: D3.A U29.1 U29.2
N$35: R34.1 U29.3 U29.7
N$36: U22.23 U30.2A
N$37: LED7.A R40.1
N$38: LED8.A R41.1
N$39: U32.7 Y4.1
N$40: U32.8 Y4.3
N$41: C39.1 U32.20
N$42: S4.1 U32.32
N$43: C40.1 R44.1 U38.1
N$44: C40.2 R45.2 U39.5
N$45: R46.2 R47.2 U39.6
N$46: D4.A U39.1 U39.2
N$47: R47.1 U39.3 U39.7
N$48: U32.23 U40.2A
N$49: LED9.A R53.1
N$50: LED10.A R54.1
N$51: U42.7 Y5.1
N$52: U42.8 Y5.3
N$53: C50.1 U42.20
N$54: S5.1 U42.32
N$55: C51.1 R57.1 U48.1
N$56: C51.2 R58.2 U49.5
N$57: R59.2 R60.2 U49.6
N$58: D5.A U49.1 U49.2
N$59: R60.1 U49.3 U49.7
N$60: U42.23 U50.2A
N$61: LED11.A R66.1
N$62: LED12.A R67.1
N$63: U52.7 Y6.1
N$64: U52.8 Y6.3
N$65: C61.1 U52.20
N$66: S6.1 U52.32
N$67: C62.1 R70.1 U58.1
N$68: C62.2 R71.2 U59.5
N$69: R72.2 R73.2 U59.6
N$70: D6.A U59.1 U59.2
N$71: R73.1 U59.3 U59.7
N$72: U52.23 U60.2A
RA: R10.1 U2.28 U3.4
RA1: R23.1 U12.28 U13.4
RA2: R36.1 U22.28 U23.4
RA3: R49.1 U32.28 U33.4
RA4: R62.1 U42.28 U43.4
RA5: R75.1 U52.28 U53.4
RB: R11.1 U2.27 U4.4
RB1: R24.1 U12.27 U14.4
RB2: R37.1 U22.27 U24.4
RB3: R50.1 U32.27 U34.4
RB4: R63.1 U42.27 U44.4
RB5: R76.1 U52.27 U54.4
RC: R12.1 U2.25 U5.4
RC1: R25.1 U12.25 U15.4
RC2: R38.1 U22.25 U25.4
RC3: R51.1 U32.25 U35.4
RC4: R64.1 U42.25 U45.4
RC5: R77.1 U52.25 U55.4
RD: R13.1 U2.24 U6.4
RD1: R26.1 U12.24 U16.4
RD2: R39.1 U22.24 U26.4
RD3: R52.1 U32.24 U36.4
RD4: R65.1 U42.24 U46.4
RD5: R78.1 U52.24 U56.4
RES: J1.5 R3.1 U2.29
RES1: J2.5 R16.1 U12.29
RES2: J3.5 R29.1 U22.29
RES3: J4.5 R42.1 U32.29
RES4: J5.5 R55.1 U42.29
RES5: J6.5 R68.1 U52.29
RXI: U1.1 U2.30
RXI1: U11.1 U12.30
RXI2: U21.1 U22.30
RXI3: U31.1 U32.30
RXI4: U41.1 U42.30
RXI5: U51.1 U52.30
RXLED: LED2.C U1.22
RXLED1: LED4.C U11.22
RXLED2: LED6.C U21.22
RXLED3: LED8.C U31.22
RXLED4: LED10.C U41.22
RXLED5: LED12.C U51.22
SCK: J1.3 U2.17
SCK1: J2.3 U12.17
SCK2: J3.3 U22.17
SCK3: J4.3 U32.17
SCK4: J5.3 U42.17
SCK5: J6.3 U52.17
SOUND: C9.2 C10.2 D1.C R9.1 U2.26
SOUND1: C19.2 C20.2 D2.C R22.1 U12.26
SOUND2: C30.2 C31.2 D3.C R35.1 U22.26
SOUND3: C41.2 C42.2 D4.C R48.1 U32.26
SOUND4: C52.2 C53.2 D5.C R61.1 U42.26
SOUND5: C63.2 C64.2 D6.C R74.1 U52.26
TXLED: LED1.C U1.23
TXLED1: LED3.C U11.23
TXLED2: LED5.C U21.23
TXLED3: LED7.C U31.23
TXLED4: LED9.C U41.23
TXLED5: LED11.C U51.23
TXO: U1.5 U2.31
TXO1: U11.5 U12.31
TXO2: U21.5 U22.31
TXO3: U31.5 U32.31
TXO4: U41.5 U42.31
TXO5: U51.5 U52.31
USB_D+: U1.15 X1.D+
USB_D+1: U11.15 X2.D+
USB_D+2: U21.15 X3.D+
USB_D+3: U31.15 X4.D+
USB_D+4: U41.15 X5.D+
USB_D+5: U51.15 X6.D+
USB_D-: U1.16 X1.D-
USB_D-1: U11.16 X2.D-
USB_D-2: U21.16 X3.D-
USB_D-3: U31.16 X4.D-
USB_D-4: U41.16 X5.D-
USB_D-5: U51.16 X6.D-